# Altium PCB head(mehdi).PcbDoc
Units mil, origin at the board's own origin, x right, y up, seen from the top; angles counter-clockwise.
Board outline 2211.03 x 2288.03 mil, 2 copper layers (Top Layer, Bottom Layer); 78 components, 45 nets, 253 pads, 85 vias.
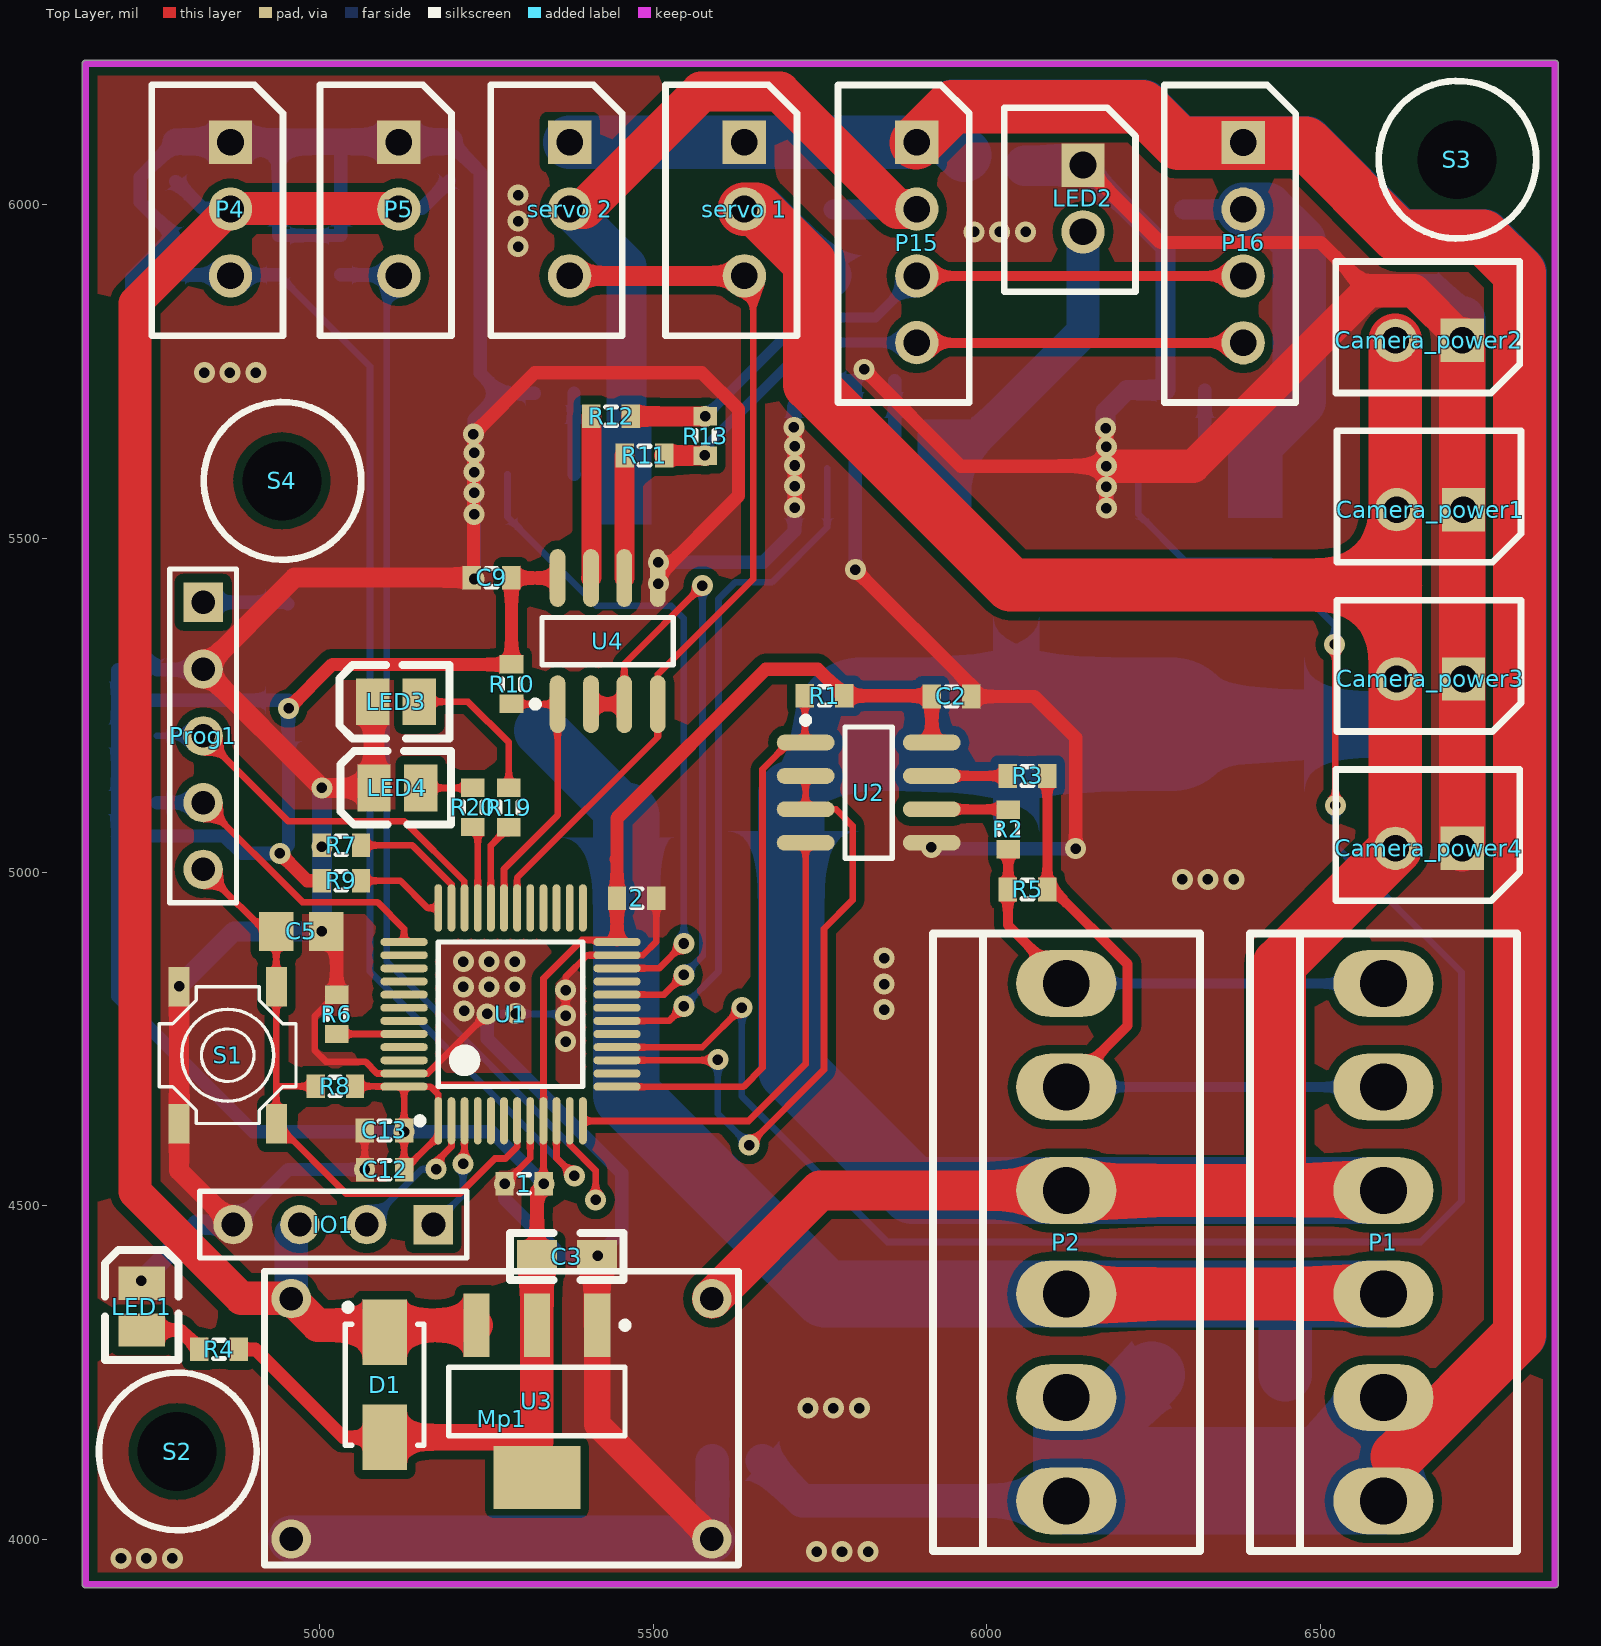
[diagram p0: Top Layer view]
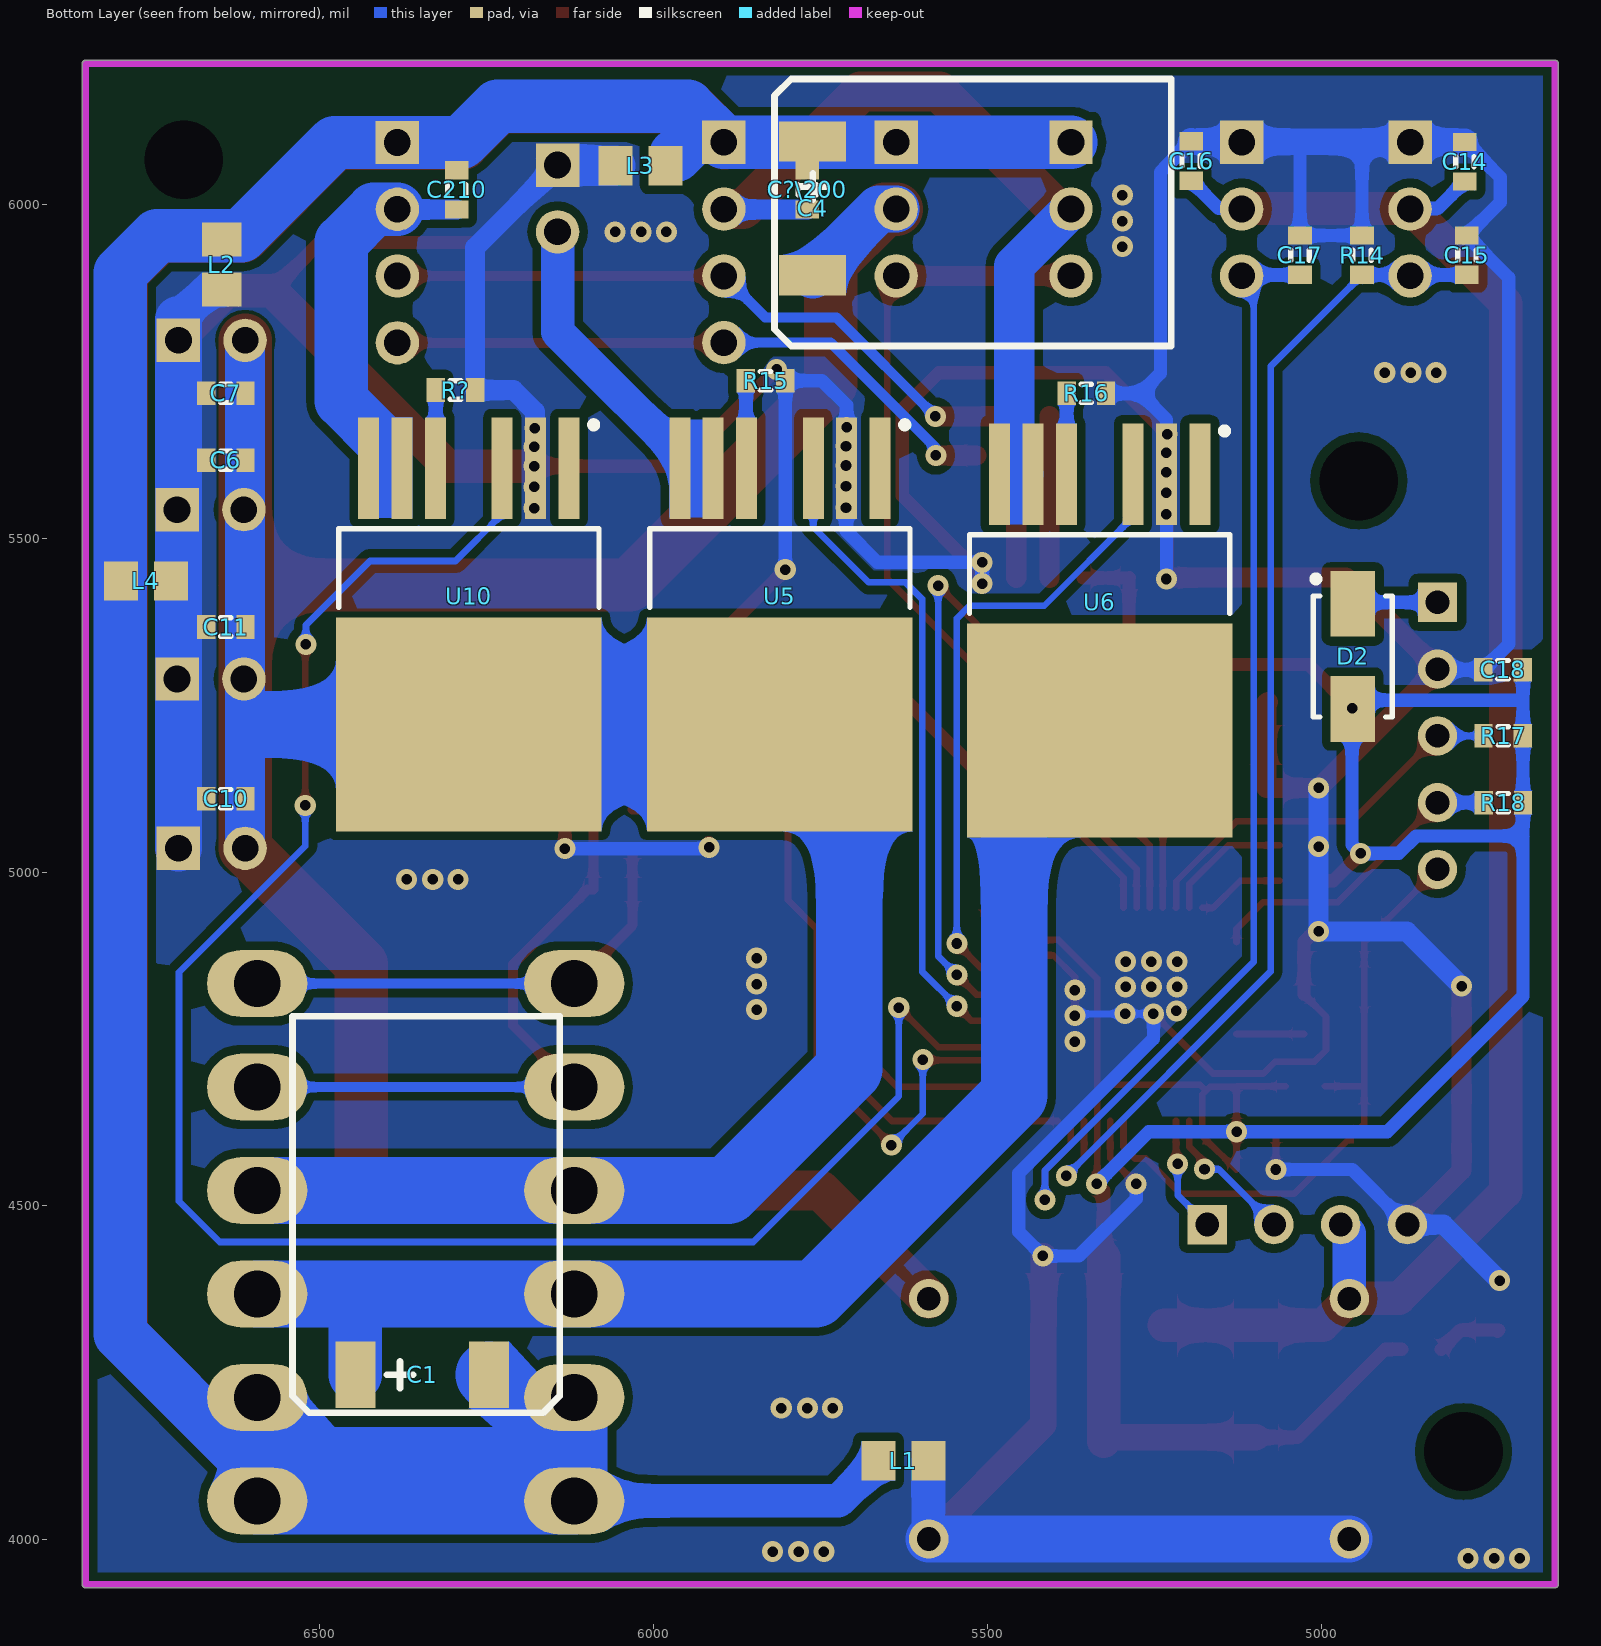
[diagram p1: Bottom Layer view, seen from below]

## Layer stack, top to bottom
Top Solder: solder mask 0.4, Solder Resist, Dk 3.5
Top Layer: signal copper 1.4
Dielectric 1: dielectric 12.6, FR-4, Dk 4.8
Bottom Layer: signal copper 1.4
Bottom Solder: solder mask 0.4, Solder Resist, Dk 3.5

## Board outline
4644.98,3933 ccw(c4650,3933) 4650,3927.99 6851,3927.99 ccw(c6851,3933) 6856.02,3933 6856.02,6211 ccw(c6851,6211) 6851,6216.02 4650,6216.02 ccw(c4650,6211) 4644.98,6211

## Design rules (kind name [scope] priority, off if disabled: settings)
AssemblyTestPointUsage [All] p1 off:
AssemblyTestpoint [All] p1 off: testpointundercomponent=TRUE minsize=40 maxsize=100 preferedsize=60 minholesize=0 maxholesize=40 preferedholesize=32 testpointgrid=1 usegrid=TRUE gridtolerance=0.01 allowsidetop=TRUE allowsidebottom=TRUE
Clearance Clearance_1 [All vs InPolygon] p1: gap=13 ignorepadtopadclearanceinfootprint=FALSE except(0: Arc-Hole Track-Hole SMDPad-Hole THPad-Hole Via-Hole Fill-Hole Poly-Hole Region-Hole Text-Hole)
Clearance [All] p2: gap=7 ignorepadtopadclearanceinfootprint=FALSE except(0: Arc-Hole Track-Hole SMDPad-Hole THPad-Hole Via-Hole Fill-Hole Poly-Hole Region-Hole Text-Hole)
ComponentClearance [All] p1 off: gap=10 collisioncheckmode=3 verticalgap=10 showdistances=FALSE
FabricationTestPointUsage [All] p1 off: valid=0 allowmultiple=FALSE
FabricationTestpoint [All] p1 off: side=3 testpointundercomponent=TRUE minsize=40 maxsize=100 preferedsize=60 minholesize=0 maxholesize=40 preferedholesize=32 testpointgrid=1 allowsidetop=TRUE allowsidebottom=TRUE usegrid=TRUE gridtolerance=0.01
Height [All] p1 off: minheight=0 maxheight=1000 prefheight=500
HoleSize [All] p1 off: absolutevalues=TRUE maxlimit=100 minlimit=1 maxpercent=80.000 minpercent=20.000
HoleToHoleClearance [All] p1 off: gap=10 allowstackedmicrovias=TRUE
LayerPairs [All] p1 off: enforce=TRUE
MinimumSolderMaskSliver [All] p1 off: minsoldermaskwidth=10
NetAntennae [All] p1 off: netantennaetolerance=0
PasteMaskExpansion [All] p1 off: expansion=0
PlaneConnect [All] p1: planeconnectstyle=Direct reliefexpansion=20 reliefentries=4 reliefconductorwidth=10 reliefairgap=10
PolygonConnect [All] p1: connectstyle=Direct reliefconductorwidth=10 reliefentries=4 polygonreliefangle="90 Angle" airgapwidth=10
RoutingVias [All] p1: holewidth=15.75 width=31.5 viastyle="Through Hole" minholewidth=11.81 minwidth=23.62 maxholewidth=28 maxwidth=50
SilkToSilkClearance [All] p1 off: silktosilkclearance=10
SilkToSolderMaskClearance [IsPad] p1 off: minsilkscreentomaskgap=10 clearancetoexposedcopper=TRUE
SolderMaskExpansion [All] p1 off: expansion=4
Width [All] p1: maxlimit=300 minlimit=10 preferedwidth=10
15 further rules are at their usual default settings.

## Components (designator, comment, footprint, x,y, rotation, side; value= is the part's Value field where it differs from the comment)
1 "" j1-0603 5307,4533 r0 top value=100nF
2 "" j1-0603 5475.47,4961 r180 top value=100nF
C1 "Cap Pol1" "CAP 470uf sleep smd" 6344,4438 r180 bottom value=470uf
C2 "Cap" j1-0603 5947,5263 r180 top value=100nF
C3 "Cap_El" 0805 5371,4424 r0 top value=10uF
C4 "Cap Pol1" "CAP 470uf sleep smd" 5571,5991 r270 bottom value="470uF 16V"
C5 "10uF" 2012[0805] 4973,4911 r0 top value=100nF
C6 "100nF" J1-0603 6641,5617 r180 bottom
C7 "100nF" J1-0603 6641,5717 r180 bottom
C9 "Cap" j1-0603 5258,5441 r0 top value=100nF
C10 "100nF" J1-0603 6641,5110 r180 bottom
C11 "100nF" J1-0603 6641,5367 r180 bottom
C12 "" j1-0603 5098,4554 r0 top value=100nF
C13 "" j1-0603 5097.53,4613 r0 top value=100nF
C14 "100nF" J1-0603 4785,6064 r270 bottom
C15 "" j1-0603 4782,5924 r90 bottom value=100n
C16 "100nF" J1-0603 5195,6065 r270 bottom
C17 "" j1-0603 5032,5924 r90 bottom value=100n
C18 "" j1-0603 4728,5303 r180 bottom value=100nF
C210 "100nF" J1-0603 6295,6022 r270 bottom
C?\200 "100nF" J1-0603 5770,6022 r270 bottom
Camera_power1 "Header 2" "jp circular 2" 6714,5542.81 r180 top
Camera_power2 "Header 2" "jp circular 2" 6712,5796.41 r180 top
Camera_power3 "Header 2" "jp circular 2" 6714,5289.22 r180 top
Camera_power4 "Header 2" "jp circular 2" 6712,5035.63 r180 top
D1 "1N4007" US1M 5098,4232 r90 top
D2 "1N4007" US1M 4953,5323 r90 bottom
IO1 "" HDR1X4 5171,4472 r180 top
L1 "" 2012[0805] 5626,4118 r0 bottom value=100uH
L2 "" 2012[0805] 6647,5910 r90 bottom value=100uH
L3 "" 2012[0805] 6020,6058 r180 bottom value=100uH
L4 "" 2012[0805] 6760.6,5436 r0 bottom value=100uH
LED1 "power" 3518 4734,4349 r90 top
LED2 "" "jp circular 2" 6144,6059 r270 top
LED3 "LED3" 3518 5115,5255 r180 top
LED4 "LED2" 3518 5117,5126 r180 top
Mp1 "Mp1584" mp1584-1.8 5628,4401 r180 top
P1 "BUS connector" CON6-TIWAN 6594,4445.5 r270 top
P2 "BUS connector" con6-tiwan 6118.98,4445.5 r270 top
P4 "Gas" "jp circular 3" 4867,6093.14 r270 top
P5 "extra_ADC" "jp circular 3" 5119.26,6093.14 r270 top
P15 "RS485_BUS" "jp circular 4" 5895,6093 r270 top
P16 "RS485_BUS" "jp circular 4" 6384,6092.83 r270 top
Prog1 "Progrommer" HDR1x5 4826,5404 r270 top
R1 "Res1" j1-0603 5757,5264 r180 top value=10K
R2 "Res1" j1-0603 6032,5064 r270 top value=100
R3 "Res1" j1-0603 6061,5144 r0 top value=100
R4 "Res1" j1-0603 4850,4285 r180 top value=220
R5 "Res1" j1-0603 6061,4974 r0 top value=120
R6 "10K" J1-0603 5026,4787 r90 top value=1K
R7 "10K" J1-0603 5033,5040 r180 top value=1K
R8 "" J1-0603 5024,4679 r180 top value=10k
R9 "10K" J1-0603 5033,4987 r0 top value=1K
R10 "Res1" j1-0603 5288,5281.47 r270 top value=10K
R11 "Res1" j1-0603 5487,5624 r0 top value=100
R12 "Res1" j1-0603 5437,5683 r0 top value=100
R13 "Res1" j1-0603 5578,5653 r90 top value=120
R14 "Res" j1-0603 4939,5924 r270 bottom value=10K
R15 "Res1" j1-0603 5832.47,5736 r0 bottom value=1K
R16 "Res1" j1-0603 5352,5717 r0 bottom value=1K
R17 "" J1-0603 4727.53,5204 r180 bottom value=10k
R18 "" J1-0603 4727.47,5104 r180 bottom value=10k
R19 "Res1" j1-0603 5284,5096.53 r90 top value=220
R20 "Res1" j1-0603 5230,5097 r90 top value=220
R? "Res1" j1-0603 6297,5722 r0 bottom value=1K
S1 "SW-PB" sw-pb-4p 4935.67,4828 r270 top
S2 "Screw Hole" "Screw Holw 3-6 mm" 4788,4132 r0 top
S3 "Screw Hole" "Screw Holw 3-6 mm" 6705,6067 r0 top
S4 "Screw Hole" "Screw Holw 3-6 mm" 4945,5586 r0 top
"servo 1" "" "jp circular 3" 5636.77,6093.14 r270 top
"servo 2" "" "jp circular 3" 5375,6093.14 r270 top
U1 "STM32F030C8T6" STM-LQFP48_N 5286.55,4786.9 r90 top
U2 "MAX485CSA" NSO8_N 5823,5119 r0 top
U3 "REG1117-3.3" SOT223 5326,4207 r270 top
U4 "MAX485CSA" NSO8_N 5432,5346 r90 top
U5 "BTS640S2G" TO127P1490X440-8_7N 5811,5370.75 r270 bottom
U6 "BTS640S2G" TO127P1490X440-8_7N 5332,5361.61 r270 bottom
U10 "BTS640S2G" TO127P1490X440-8_7N 6277,5370.75 r270 bottom

## Footprints (in the part's own frame and the unit in brackets; to place one, negate y for a bottom-side part, rotate by r counter-clockwise, add the part's x,y. Pads: shape width x height; smd on the part's side, far side on the other; paste and mask are expansions set on the pad)
0805 [mil]
  rect 60x50 smd: 1(-45,0) 2(45,0)
  silkscreen extent -85,-35 85,35
2012[0805] [mm] "Chip Resistor; Body 2.0 x 1.3 mm (LxW typ)"
  rect 1.3x1.5 smd: 1(-0.95,0) 2(0.95,0)
  body extent -1.22,-0.75 1.28,0.75, height 0.5
3518 [mil]
  rect 50x70 smd: 1(35,0) 2(-35,0)
  silkscreen extent -80,-55 85,55, body extent -63,-31 63,32, height 43
"CAP 470uf sleep smd" [mil]
  rect 60x100 smd: 1(-103,-191) 2(97,-191)
  silkscreen extent -197,-248 203,346
CON6-TIWAN [mil]
  oval 100x150 hole 70: 1(-387.5,0) 2(-232.5,0) 3(-77.5,0) 4(77.5,0) 5(232.5,0) 6(387.5,0)
  silkscreen extent -463,-200 463,200
con6-tiwan [mil]
  oval 100x150 hole 70: 1(-387.5,0) 2(-232.5,0) 3(-77.5,0) 4(77.5,0) 5(232.5,0) 6(387.5,0)
  silkscreen extent -463,-200 463,200
HDR1X4 [mm] "Connector; Header; 4 Position"
  rect 1.5x1.5 hole 0.9: 1(0,0)
  round 1.5 hole 0.9: 2(2.54,0) 3(5.08,0) 4(7.62,0)
  silkscreen extent -1.27,-1.27 8.89,1.27
HDR1x5 [mm] "Connector; Header; 5 Position"
  rect 1.5x1.5 hole 0.9: 1(0,0)
  round 1.5 hole 0.9: 2(2.54,0) 3(5.08,0) 4(7.62,0) 5(10.16,0)
  silkscreen extent -1.27,-1.27 11.43,1.27
j1-0603 [mm] "Chip Resistor, Body 1.6x0.8mm, IPC High Density"
  rect 0.7x0.9 smd: 1(-0.75,0) 2(0.75,0)
  silkscreen extent -0.2,-0.35 0.2,0.35, body extent -0.85,-0.48 0.85,0.48, height 0.9
J1-0603 [mm] "Chip Resistor, Body 1.6x0.8mm, IPC High Density"
  rect 0.7x0.9 smd: 1(-0.75,0) 2(0.75,0)
  silkscreen extent -0.2,-0.35 0.2,0.35, body extent -0.85,-0.48 0.85,0.48, height 0.9
"jp circular 2" [mil]
  rect 65x65 hole 40: 1(0,0)
  round 65 hole 40: 2(100,0)
  silkscreen extent -86,-118 190,79, body extent -96,-118 196,75, height 216
"jp circular 3" [mil]
  rect 65x65 hole 40: 1(0,0)
  round 65 hole 40: 2(100,0) 3(200,0)
  silkscreen extent -86,-118 290,79, body extent -92,-118 298,75, height 216
"jp circular 4" [mil]
  rect 65x65 hole 40: 1(0,0)
  round 65 hole 40: 2(100,0) 3(200,0) 4(300,0)
  silkscreen extent -86,-118 390,79, body extent -92,-118 396,74, height 216
mp1584-1.8 [mm]
  round 1.5 hole 0.9: 1(1.016,10.16) 2(1.016,1.016) 3(17.016,10.16) 4(17.016,1.016)
  silkscreen extent 0,-0.03 18.03,11.15
NSO8_N [mm] "SOIC, 8-Leads, Body 4.9x3.9mm, Pitch 1.27mm, IPC Medium Density"
  oval 2.2x0.6 smd: 1(-2.4,1.905) 2(-2.4,0.635) 3(-2.4,-0.635) 4(-2.4,-1.905) 5(2.4,-1.905) 6(2.4,-0.635) 7(2.4,0.635) 8(2.4,1.905)
  silkscreen extent -2.52,-2.5 0.9,2.88, body extent -2,-2.5 2,2.5, height 1.75
"Screw Holw 3-6 mm" [mil]
  round 0 hole 118.11: 0(-1,0)
  silkscreen extent -118,-118 118,118
SOT223 [mm] "SOT223, 4-Leads, Body 6.7x7.3mm (max), Pitch 2.30mm, IPC Medium Density"
  rect 2.4x1 smd: 1(-2.9,2.3) 2(-2.9,0) 3(-2.9,-2.3)
  rect 2.4x3.3 smd: 4(2.9,0)
  silkscreen extent -3.02,-3.35 1.3,3.48, body extent -1.85,-3.35 1.85,3.35, height 1.8
STM-LQFP48_N [mm] "QFP, 48-Leads, Body 7x7mm, Pitch 0.5mm, IPC Medium Density"
  oval 1.8x0.3 smd: 1(-4.05,2.75) 2(-4.05,2.25) 3(-4.05,1.75) 4(-4.05,1.25) 5(-4.05,0.75) 6(-4.05,0.25) 7(-4.05,-0.25) 8(-4.05,-0.75) 9(-4.05,-1.25) 10(-4.05,-1.75) 11(-4.05,-2.25) 12(-4.05,-2.75) 25(4.05,-2.75) 26(4.05,-2.25) 27(4.05,-1.75) 28(4.05,-1.25) 29(4.05,-0.75) 30(4.05,-0.25) 31(4.05,0.25) 32(4.05,0.75) 33(4.05,1.25) 34(4.05,1.75) 35(4.05,2.25) 36(4.05,2.75)
  oval 0.3x1.8 smd: 13(-2.75,-4.05) 14(-2.25,-4.05) 15(-1.75,-4.05) 16(-1.25,-4.05) 17(-0.75,-4.05) 18(-0.25,-4.05) 19(0.25,-4.05) 20(0.75,-4.05) 21(1.25,-4.05) 22(1.75,-4.05) 23(2.25,-4.05) 24(2.75,-4.05) 37(2.75,4.05) 38(2.25,4.05) 39(1.75,4.05) 40(1.25,4.05) 41(0.75,4.05) 42(0.25,4.05) 43(-0.25,4.05) 44(-0.75,4.05) 45(-1.25,4.05) 46(-1.75,4.05) 47(-2.25,4.05) 48(-2.75,4.05)
  silkscreen extent -4.17,-2.75 2.75,3.57, body extent -3.5,-3.5 3.5,3.5, height 1.6
sw-pb-4p [mm]
  rect 1.5x0.8 smd: 1(0,0) 1(5.2,0) 2(0,-3.7) 2(5.2,-3.7)
  silkscreen extent 0,-4.45 5.2,0.75, body extent 0,-4.45 5.22,0.75, height 2.2
TO127P1490X440-8_7N [mm] "TO,1.27mm pitch;7 pin,14.90mm L X 9.20mm W X 4.40mm H body"
  rect 3.85x0.8 smd paste+0 mask+0: 1(-5.95,3.81) 2(-5.95,2.54) 3(-5.95,1.27) 5(-5.95,-1.27) 6(-5.95,-2.54) 7(-5.95,-3.81)
  rect 8.15x10.1 smd paste+0 mask+0: 8(3.8,0)
  silkscreen extent -7.72,-4.95 -0.65,4.95, body extent -7.47,-5 7.48,5, height 4.51
US1M [mm] "Molded Diode, 2-Leads, Body 4.3x2.6mm, IPC Medium Density"
  rect 2.5x1.7 smd: 1(-2,0) 2(2,0)
  silkscreen extent -2.3,-1.5 3.07,1.52, body extent -2.3,-1.46 2.3,1.46, height 2.3

## Part data
1 2 C12 C13 C18: library part Cap, "Capacitor", Manufacturer="Generic Components", Class=Passive, Published=08/06/2000, Publisher="Altium Hobart Technology Centre", SubClass=Capacitor
C1 C4: "Polarized Capacitor (Radial)", LatestRevisionDate=17-Jul-2002, LatestRevisionNote="Re-released for DXP Platform.", PackageReference=RB7.6-15, Published=8-Jun-2000, Publisher="Altium Limited"
C2 C3 C9: "Capacitor", Publisher="Altium Limited"
  C2 C9: LatestRevisionDate=17-Jul-2002, LatestRevisionNote="Re-released for DXP Platform.", PackageReference=RAD-0.3, Published=8-Jun-2000
  C3: PackageReference=CAPR5-4X5, Published=23-Sep-2002
C5 C6 C7 C10 C11 C14 C16 C210 C?\200: library part Cap, "Capacitor", LatestRevisionDate=17-Jul-2002, LatestRevisionNote="Re-released for DXP Platform.", PackageReference=RAD-0.3, Published=8-Jun-2000, Publisher="Altium Limited"
C15 C17: library part "Cap Pol1", "Polarized Capacitor (Radial)", Manufacturer="Generic Components", Class=Passive, Published=08/06/2000, Publisher="Altium Hobart Technology Centre", SubClass=Capacitor
Camera_power1 Camera_power2 Camera_power3 Camera_power4: "Header, 2-Pin", Publisher="Altium Limited", Revision="17-Jul-2002: Re-released for DXP Platform."
D1 D2: library part Diode, "1 Amp General Purpose Rectifier", Package Information="Latest Revision: Aug-1999", Package Reference=DO-41, Code - JEDEC=DO-204-AL, Datasheet="Latest Revision: 1998", Published=8-Jun-2000, Publisher="Altium Limited", Revision 1="11-Jul-2000: SIM Model Added.", Revision 2="17-Jul-2002: Re-released for DXP Platform."
IO1 P15 P16: library part "Header 4", "Header, 4-Pin", LatestRevisionDate=17-Jul-2002, LatestRevisionNote="Re-released for DXP Platform.", Publisher="Altium Limited"
L1 L2 L3 L4: library part Inductor, "Inductor", Manufacturer="Generic Components", Class=Passive, Published=08/06/2000, Publisher="Altium Hobart Technology Centre", SubClass=Inductor
LED1 LED4: library part LED3, "Typical BLUE SiC LED", PackageDocument=16-Apr-2002, DatasheetDocument=16-Apr-2002, LatestRevisionDate=17-Dec-2003, LatestRevisionNote="PCB Footprint replaced.", PackageReference=3.5X2.8X1.9, Published=8-Jun-2000, Publisher="Altium Limited"
LED2: library part "Header 2", "Header, 2-Pin", LatestRevisionDate=17-Jul-2002, LatestRevisionNote="Re-released for DXP Platform.", Publisher="Altium Limited"
LED3: "Typical BLUE SiC LED", PackageDocument=16-Apr-2002, DatasheetDocument=16-Apr-2002, LatestRevisionDate=17-Dec-2003, LatestRevisionNote="PCB Footprint replaced.", PackageReference=3.5X2.8X1.9, Published=8-Jun-2000, Publisher="Altium Limited"
P1 P2: library part "Header 6", "Header, 6-Pin", LatestRevisionDate=17-Jul-2002, LatestRevisionNote="Re-released for DXP Platform.", Publisher="Altium Limited"
P4 P5 "servo 1" "servo 2": library part "Header 3", "Header, 3-Pin", LatestRevisionDate=17-Jul-2002, LatestRevisionNote="Re-released for DXP Platform.", Publisher="Altium Limited"
Prog1: library part "Header 5", "Header, 5-Pin", LatestRevisionDate=17-Jul-2002, LatestRevisionNote="Re-released for DXP Platform.", Publisher="Altium Limited"
R1 R2 R3 R4 R5 R10 R11 R12 R13 R15 R16 R19 R20 R?: "Resistor", LatestRevisionDate=17-Jul-2002, LatestRevisionNote="Re-released for DXP Platform.", PackageReference=AXIAL-0.3, Published=8-Jun-2000, Publisher="Altium Limited"
R6 R7 R9: library part Res1, "Resistor", LatestRevisionDate=17-Jul-2002, LatestRevisionNote="Re-released for DXP Platform.", PackageReference=AXIAL-0.3, Published=8-Jun-2000, Publisher="Altium Limited"
R8 R17 R18: library part Res, "Semiconductor Resistor", LatestRevisionDate=17-Jul-2002, LatestRevisionNote="Re-released for DXP Platform.", PackageReference=AXIAL-0.5, Published=8-Jun-2000, Publisher="Altium Limited"
R14: "Semiconductor Resistor", LatestRevisionDate=17-Jul-2002, LatestRevisionNote="Re-released for DXP Platform.", PackageReference=AXIAL-0.5, Published=8-Jun-2000, Publisher="Altium Limited"
S1: "Switch", LatestRevisionDate=17-Jul-2002, LatestRevisionNote="Re-released for DXP Platform.", PackageReference=SPST-2, Published=24-Mar-1999, Publisher="Altium Limited"
U1: "ARM Cortex-M0 32-bit MCU, 64 KB Flash, 8 KB Internal RAM, 39 I/Os, 48-pin LQFP, -40 to 85 degC, Tray", I/Os (High Current)=39, Operating Frequency(F) (Processor speed) (MHz)=48, Supplier Part Number 1=497-14043-ND, Supply Voltage(Vcc) min (V)=2.4, ComponentLink1Description="Manufacturer URL", ComponentLink1URL=http://www.st.com/web/en/home.html, ComponentLink2Description=Datasheet, ComponentLink2URL=http://www.st.com/st-web-ui/static/active/en/resource/technical/document/datasheet/DM00088500.pdf, ComponentLink3Description="Package Specification", ComponentLink3URL=http://www.st.com/st-web-ui/static/active/en/resource/technical/document/datasheet/DM00058181.pdf, Core="ARM Cortex-M0", DatasheetVersion="Rev. 1", FLASH Size (Prog) (kB)=64, Internal RAM Size (kB)=8, Mounting Technology="Surface Mount", PackageDescription="48-Pin Low Profile Quad Flat Package, 7 x 7 mm Body, 0.5 mm Pitch", PackageReference=LQFP48, PackageVersion="Rev. 6, 06/2013", Packing=Tray, PartNumber=STM32F030C8T6, Supplier 1=Digi-Key, Supplier 2=Newark, Supplier 3=Mouser, Supplier Part Number 2=06X3647, Supplier Part Number 3=511-STM32F030C8T6
U2 U4: "Low-Power, Slew-Rate-Limited RS-485/RS-422 Transceiver", Code_IPC=SOIC127P600-8, Code_JEDEC=MS-012-AA, ComponentLink1Description="Manufacturer Link", ComponentLink1URL=http://www.maxim-ic.com/, ComponentLink2Description=Datasheet, ComponentLink2URL=http://pdfserv.maxim-ic.com/en/ds/MAX1487-MAX491.pdf, DatasheetVersion=Feb-1996, LatestRevisionDate=13-Apr-2006, LatestRevisionNote="IPC-7351 Footprint Added.", PackageDescription="8-Pin Small Outline Integrated Circuit 1.27 mm Pitch", PackageReference=NSO8, Published=16-Jan-2001, Publisher="Altium Limited"
U3: "800mA and 1A Low Dropout Positive Regulator 2.85V, 3.3V, 5V, and Adjustable", ComponentLink1Description="Manufacturer Link", ComponentLink1URL=http://www.ti.com/, ComponentLink2Description=Datasheet, ComponentLink2URL=http://www-s.ti.com/sc/ds/REG1117.pdf, DatasheetVersion=Sep-1997, LatestRevisionDate=17-Jul-2002, LatestRevisionNote="Re-released for DXP Platform.", PackageDescription="SOT-223/SC-73; 4 Leads; Body 6.7 x 7.3 mm, inc. leads (LxW max)", PackageReference=ZZ311, PackageVersion=revC, Published=8-Jun-2000, Publisher="Altium Limited"
U5 U6 U10: "Smart Sense High-Side Power Switch, VBB 43V, R(ON) 30mOhm", Manufacturer="Infineon Technologies", ManufacturerPartNumber=BTS640S2G, PackageReference=PG-TO263-7-2

## Via types
v1: diameter 31.5, hole 15.75, Top Layer to Bottom Layer, tented both sides, 78 vias
v2: diameter 31.5, hole 15.75, Top Layer to Bottom Layer, 7 vias

## Nets (pads, with @x,y where several pads share a name; then routed paths per layer and width w, separated by ;. In a path a pad name is that pad's centre, name@x,y a point inside that pad or via, vN(x,y) a via of type N, cw(c..) or ccw(c..) an arc to the next point about the centre after c; other vN are vias at no path point)
1wire: "servo 1.3" "servo 2.3" U1.30 U4.4 | length 1399.9
  Top Layer w10: U1.30 5296.39,4991.39 5507,5202 U4.4 5507,5296 5650,5439 5650,5893.14 ; 5636.77,5890.14 5636.77,5891
  Top Layer w30: 5375,5893.14 5633.77,5893.14 ; 5636.77,5890.14 5633.77,5893.14 ; 5650,5893.14 5636.77,5893.14 5633.77,5893.14
  Bottom Layer w10: 5618,5874.37 5636.77,5893.14
+3.3: 1.2 2.2 C2.2 C3.1 C9.2 C12.2 C13.2 C18.2 D1.1 D2.1 R1.1 R4.1 R8.1 R9.1 R10.1 R17.2 R18.2 U1.1 U1.9 U1.24 U1.48 U2.8 U3.2 U3.4 U4.8 | length 5375.1
  Top Layer w10: R8.1 5126.73,4679 U1.48 ; v1(5336.53,4533) 5335.76,4533.76 U1.9 5335.76,4682 ; U1.24@5445.94,4898.44 5393.44,4898.44 5335.76,4840.76 5335.76,4682 ; U1.48 5166.37,4678.63 5172.5,4672.5 ; U1.48 U1.48 C13.2 5127.06,4554.47 C12.2 5178.28,4604.76 U1.1 5178.28,4666.72 5172.5,4672.5 ; 5172.5,4672.5 5181.31,4681.31 5335.08,4681.31 5335.76,4682
  Top Layer w20: R4.1 4904,4285 5035.74,4153.26 D1.1 ; v1(4941,5028) 4982,4987 R9.1 ; v1(4954,5245.26) 5019.74,5311 R10.1 C9.2@5288,5440.53 ; C9.2 C9.2@5288,5440.53 ; C3.1 5326,4522.47 v1(5336.53,4533) ; U4.8 5288.04,5440.49 C9.2@5288,5440.53 ; 5444.94,5019 5445.94,5018 ; U1.24@5446,4898.39 5446,4898.44 5445.94,4898.5 2.2 5445.94,5018 ; C2.2 5916.47,5264 R1.1 5746.53,5304 5669,5304 5445.94,5080.94 5445.94,5018 ; U2.8 C2.2
  Top Layer w40: D1.1 5319.74,4153.26 5326,4147
  Top Layer w50: 5326,4147 U3.2 C3.1
  Bottom Layer w20: C18.2 4697.94,5302.47 4697.94,5259 ; D2.1@4953,5213.47 D2.1 v1(4954,5245.26) 4954,5041 v1(4941,5028) 4884,5028 4858,5054 4697.94,5054 ; D2.1@4954,5257.47 4699.47,5257.47 4697.94,5259 ; v1(5336.53,4533) 5258.53,4611 v1(5127,4611) 4901,4611 4697.94,4814.06 4697.94,5054 ; 4697.94,5054 R18.2 4697.94,5259
+5: C14.2 C16.2 D1.2 IO1.3 Mp1.4 P4.2 P5.2 U3.3 | length 2686.3
  Top Layer w50: P5.2@5119.26,5994 4866,5994 4724,5852 4724,4521 4883.28,4361.72 4957.36,4361.72 Mp1.4 4997.91,4321.17 U3.3
  Bottom Layer w20: C14.2 4825.47,5994 P4.2@4866,5994 ; P5.2@5119.26,5994 5153.53,5994 C16.2
  Bottom Layer w50: Mp1.4 4958.08,4459.08 IO1.3
+12: "servo 1.2" C4.2 C6.2 C7.2 C10.2 C11.2 Camera_power1.2 Camera_power2.2 Camera_power3.2 Camera_power4.2 Mp1.2 P1.3 P2.3 U5.8 U10.8 | length 6992.8
  Top Layer w60: Mp1.2 5750,4523 P2.3
  Top Layer w80: 5636.77,5993.14 5653.86,5993.14 5735,5912 5735,5731 6036,5430 6612,5430 ; P2.3 P1.3 ; 6438,4566 6438,4861.63 Camera_power4.2 6612,5430 ; Camera_power2.2 6612,5430
  Bottom Layer w60: Camera_power4.2 6612,5542.81 Camera_power2.2
  Bottom Layer w70: 5636.77,5993.14 5662.86,5993.14 C4.2
  Bottom Layer w80: U5.8@5707,5117.14 U5.8 U5.8@5864.08,5274.22 ; P2.3 P2.3@6143,4523
  Bottom Layer w100: U5.8@5707,5117.14 5707,4705 5889,4523 P2.3 ; P2.3@6143,4523 P1.3 ; U10.8 6590,5221.14
  Bottom Layer w200: U5.8 U10.8
+12_Switch: C210.2 P16.2 U10.6 U10.7 | length 519.1
  Bottom Layer w30: C210.2 6383.64,5992.47 P16.2
  Bottom Layer w80: P16.2 6419.17,5992.83 6468,5944 6468,5706 6406,5644
+16: C1.1 P1.4 P2.4 U6.8 | length 2453.3
  Top Layer w80: P2.4 P1.4
  Bottom Layer w80: U6.8 U6.8@5460,5084 ; 6445,4368 6447,4366 C1.1
  Bottom Layer w100: U6.8@5460,5084 5460,4666 5758,4368 P2.4 6445,4368 P1.4
+16_Switch: "servo 2.2" C?\200.2 P15.2 U6.6 U6.7 | length 1244.1
  Top Layer w60: 5375,5993.14 5396.14,5993.14 5572,6169 5690,6169 5866,5993 P15.2
  Bottom Layer w30: C?\200.2 5894.47,5992.47 P15.2
  Bottom Layer w60: 5375,5993.14 5460,5908.14 5460,5609.86 5446,5595.86 5460.86,5595.86
Bus_EN_max: U1.15 U2.2 U2.3 | length 970.9
  Top Layer w10: U1.15 5596,4718 v1(5597,4719) ; v1@5644,4592 5756,4704 5756,4915 5799,4958 5799,5069 5774,5094 U2.3 U2.2
  Bottom Layer w10: v1(5597,4719) 5597,4638 v1(5644,4591)
Bus_RXUSART: R1.2 U1.13 U2.1 | length 829.2
  Top Layer w10: U1.13@5445.24,4678.28 5635.28,4678.28 5664,4707 5664,5154 5704,5194 U2.1 5727.47,5195.04 R1.2
Bus_TXUSART: U1.12 U2.4 | length 700.6
  Top Layer w10: U1.12@5394.78,4627.1 5643.1,4627.1 5728.51,4712.51 U2.4
D+: P1.1 P2.1 R2.2 R5.1 | length 713
  Top Layer w15: R2.2 6032,4974.53 R5.1 6031.47,4920.5 P2.1
  Bottom Layer w15: P2.1 P1.1
D-: P1.2 P2.2 R3.2 R5.2 | length 1034
  Top Layer w15: R3.2 R5.2 6099,4974 6211,4862 6211,4770.02 P2.2
  Bottom Layer w15: P2.2 P1.2
Dyna_D+: P15.4 P16.4 R11.2 R13.1 | length 945
  Top Layer w15: P15.4 5895.17,5792.83 P16.4
  Top Layer w30: R11.2 v2(5577.47,5624) R13.1
  Bottom Layer w15: v2(5577.47,5624) 5577.47,5635.47 5735,5793 P15.4
Dyna_D-: P15.3 P16.3 R12.2 R13.2 | length 1004.3
  Top Layer w15: P15.3 6383.83,5893 P16.3
  Top Layer w30: R12.2@5467,5682.53 v2(5578,5682.53)
  Bottom Layer w15: v2(5578,5682.53) 5726.47,5831 5833,5831 P15.3
EN_max: U1.20 U4.2 U4.3 | length 982.8
  Top Layer w10: U1.20 5516.43,4816.43 v1(5546,4846) ; U4.3 5457,5312 v1(5574,5429)
  Top Layer w20: U4.2 U4.3
  Bottom Layer w10: v1(5546,4846) 5574,4874 v1(5574,5429)
ex_ADC: C17.1 P5.3 U1.11 | length 1744.2
  Top Layer w10: U1.11 5375.13,4591.87 5414,4553 v1(5414,4509)
  Bottom Layer w10: P5.3@5118.78,5894.47 5119.26,5894 5101,5875.74 5101,4866 5414,4553 v1(5414,4509)
  Bottom Layer w20: C17.1 P5.3@5118.78,5894.47
EXT_LED_EN: U1.18 U5.3 | length 1036.4
  Top Layer w10: U1.18 5524.06,4777.06 v1(5546,4799)
  Bottom Layer w10: v1(5546,4799) 5598,4851 5598,5409 5623,5434 5678,5434 5761,5517 U5.3
gas_sensor: C15.1 P4.3 R14.2 U1.10 | length 1783.4
  Top Layer w10: U1.10 5355.45,4571.55 v1(5382,4545)
  Bottom Layer w10: R14.2 5076,5757.47 5076,4851 v1(5382,4545)
  Bottom Layer w20: C15.1 R14.2
GND: 1.1 2.1 C2.1 C3.2 C5.2 C6.1 C7.1 C9.1 C10.1 C11.1 C12.1 C13.1 C14.1 C15.2 C16.1 C17.2 C18.1 Camera_power1.1 Camera_power2.1 Camera_power3.1 Camera_power4.1 IO1.4 L1.1 L2.1 L3.1 L4.1 LED1.1 LED2.1 LED3.1 LED4.1 Mp1.1 Mp1.3 P4.1 P5.1 Prog1.2 R6.2 R7.2 R14.1 R15.1 R16.1 R?.1 S1.2 U1.8 U1.23 U1.47 U2.5 U3.1 U4.5 U5.2 U6.2 U10.2 | length 14645
  Top Layer w10: R6.2 4993,4783.53 4993,4733 5010,4716 5069,4716 5086.69,4698.31 U1.47 5162.31,4698.31 v1(5251.5,4787.5) ; C13.1 v1(5068,4554.47) C12.1 ; v1(5277.47,4533) 5316.08,4571.61 U1.8 ; v1(5369,4785) v1(5369,4823) 5369,4843 5401.48,4875.48 U1.23 5484.48,4875.48 5505,4896 2.1
  Top Layer w20: C5.2 5026,4895.4 R6.2 ; C9.1 5231,5443.53 5231,5599 v1(5231,5656) 5323,5748 5573,5748 5628,5693 5628,5563.49 5506,5441.49 U4.5 ; v1(5711,5666) 5712,5665 v1(5712,5638) v1(5712,5609) v1(5712,5578) v1(5712,5546) ; v2(5803,5453) 5976.53,5279.47 C2.1 6071,5263 6133,5201 v1(6133,5035) ; v2(5816,5753) 5961,5608 v1(6179,5608) ; v1(5917,5037) 5917,5043.22 5917.49,5043.71 U2.5 ; LED2.1 6260,5943 6500,5943 6572,5871 ; v1(6178,5665) 6179,5664 v1(6179,5637) v1(6179,5608) ; v1(6179,5545) v1(6179,5577) v1(6179,5608) ; 6637.41,5871 Camera_power2.1
  Top Layer w30: S1.2@4790,4828 4790,4623.28 4790,4553 IO1.4 ; LED3.1 5082,5253 LED4.1 v1(5004,5126) Prog1.2 4963,5441 C9.1
  Top Layer w40: C3.2 5416,4321.72 U3.1 5416.55,4172.45 Mp1.1
  Top Layer w50: v1(6179,5608) 6309,5608 6572,5871 6637.41,5871 6639.23,5871 6712,5798.23 Camera_power2.1
  Top Layer w70: Camera_power4.1 Camera_power2.1
  Bottom Layer w10: v1(5251.5,4787.5) 5366.5,4787.5 v1(5369,4785)
  Bottom Layer w20: Prog1.2 4825,5303 C18.1 4719,5341.53 4719,5890.53 C15.2 4732,6003.53 4732,6040.53 C14.1 4865.53,6093.53 P4.1@4866,6094 ; IO1.4 4953.47,4554.47 v1(5068,4554.47) ; 4939,6095 4939,6094 R14.1 C17.2 5032,6092 ; C16.1 5241,6048.53 5241,5747 5271,5717 ; v1(5232,5439) U6.2 5232,5678 5271,5717 ; v1(5251.5,4787.5) 5251.5,4750.5 5453,4549 5453,4461 v1(5417,4425) 5363,4425 5277.47,4510.53 v1(5277.47,4533) ; R16.1 5271,5717 ; v1(5508,5432) v1(5508,5464) 5665,5464 5712,5511 v1(5712,5546) v1(5712,5578) ; U5.2 5711,5638 v1(5711,5666) 5711,5699 5748,5736 R15.1 ; v2(5803,5453) 5802.94,5453.06 R15.1 ; v2(5816,5753) 5816,5749.06 R15.1 ; v1(5917,5037) 5917,5040 5922,5035 v1(6133,5035) ; U10.2@6178,5604 6178,5608 v1(6178,5665) ; v1(6179,5545) v1(6179,5577) ; Camera_power4.1@6712,5026 Camera_power4.1
  Bottom Layer w30: v1(4733,4388) 4817,4472 IO1.4 ; v1(4790,4829) 4872,4911 v1(5004,4911) v1(5004,5038) v1(5004,5126) ; L1.1@5588,4117.4 L1.1 ; LED2.1 6267.47,5935.53 R?.1 6210,5722 6178,5690 v1(6178,5665)
  Bottom Layer w40: C14.1 4785.47,6094 4866,6094 4939,6094 C16.1@5187,6094 ; C16.1@5195,6094 C16.1
  Bottom Layer w50: Mp1.1 5588.6,4001.6 L1.1 ; L2.1@6646,5871 6669,5871 Camera_power2.1@6712,5828
  Bottom Layer w60: L3.1 6143,6058 LED2.1
  Bottom Layer w70: Mp1.3 Mp1.1 ; Camera_power4.1 6712,5436 Camera_power2.1 Camera_power2.1@6712,5828
  other v1: 4703,3972 4741,3972 4780,3972 5745,3982 5783,3982 5822,3982 5732,4197 5770,4197 5809,4197 5369,4746 5294,4788 5217,4792 5846,4794 5216,4828 5254.5,4828 5293,4828 5846,4832 5216,4866 5254.5,4866 5293,4866 5846,4871 6293,4989 6331,4989 6370,4989 5232,5536 5232,5568 5232,5599 5232,5628 4828,5748 4866,5748 4905,5748 5298,5937 5981,5959 6019,5959 6058,5959 5298,5975 5298,6014
IO1: IO1.1 U1.3 | length 179.5
  Top Layer w10: v1(5215.31,4563) 5217.65,4560.65 U1.3
  Bottom Layer w10: IO1.1 5215.31,4516.31 v1(5215.31,4563)
IO2: IO1.2 U1.2 | length 220.3
  Top Layer w10: v1(5175,4555) 5175,4566 5197.97,4588.97 U1.2
  Bottom Layer w10: IO1.2 5154,4555 v1(5175,4555)
LED_blue: R19.1 U1.32 | length 131.8
  Top Layer w10: U1.32 5257.02,5040.02 R19.1
LED_red: R20.1 U1.33 | length 124.2
  Top Layer w10: R20.1 5237.34,5060.13 U1.33
NetD2_2: D2.2 Prog1.1 | length 127.9
  Bottom Layer w20: Prog1.1 4950.74,5404 D2.2
NetLED1_1: LED1.2 R4.2 | length 101.3
  Top Layer w20: LED1.2@4736,4312 LED1.2 4791.47,4314 R4.2
NetLED2_2: LED2.2 U5.6 U5.7 | length 445.6
  Bottom Layer w50: 5935,5600 6144,5809 LED2.2
NetLED3_1: LED3.2 R19.2 | length 227.2
  Top Layer w10: LED3.2 5223,5255 5284,5194 R19.2
NetLED4_1: LED4.2 R20.2 | length 78.2
  Top Layer w10: LED4.2 5229.47,5126 R20.2
NetR2_1: R2.1 U2.6 | length 114.7
  Top Layer w15: U2.6 6031.53,5094 R2.1
NetR3_1: R3.1 U2.7 | length 114
  Top Layer w15: U2.7 R3.1
NetR6_1: R6.1 U1.44 | length 101.1
  Top Layer w10: R6.1 5127,4757.47 U1.44
NetR7_1: R7.1 U1.35 | length 194.8
  Top Layer w10: R7.1 5139.48,5040 5197.97,4981.51 U1.35
NetR9_2: R9.2 U1.36 | length 132.6
  Top Layer w10: R9.2 5121.47,4987 5162.13,4946.35 U1.36
NetR11_1: R11.1 U4.6 | length 183.7
  Top Layer w30: U4.6 5457,5623.53 R11.1
NetR12_1: R12.1 U4.7 | length 242.7
  Top Layer w30: U4.7 5407.47,5440.96 R12.1
NetR15_2: R15.2 U5.5 | length 131.4
  Bottom Layer w20: U5.5 5862,5606 R15.2
NetR16_2: R16.2 U6.5 | length 121.3
  Bottom Layer w20: R16.2 5381.53,5596.33 U6.5
NetR?_2: R?.2 U10.5 | length 117.2
  Bottom Layer w20: R?.2 6326.53,5605.47 U10.5
PGND: "servo 1.1" "servo 2.1" C1.2 C4.1 C210.1 C?\200.1 L1.2 L2.2 L3.2 L4.2 P1.5 P1.6 P2.5 P2.6 P15.1 P16.1 | length 8317.7
  Top Layer w80: P15.1@5893.86,6092.14 5947.86,6146.14 6232.86,6146.14 6287.03,6091.97 6477.03,6091.97 6616.86,5952.14 6742.86,5952.14 6797.86,5897.14 6797.86,4307.14 6614.86,4124.14
  Bottom Layer w50: L1.2 5723.4,4058 P2.6
  Bottom Layer w80: 5375,6093.14 5636.77,6093.14 5894.86,6093.14 P15.1 5949,6147 ; L3.2@5966.8,6073.8 5949,6091.6 5949,6147 ; 6616,4125 6799,4308 6799,5898 6744,5953 6618,5953 6478.17,6092.83 P16.1 6288.17,6092.83 6234,6147 5949,6147
  Bottom Layer w100: P2.5 6118.98,4118.98 ; C1.2 6118.98,4118.98 ; 6118.98,4118.98 6499.98,4118.98 P1.5 P1.6 P2.6 6118.98,4118.98
RST: C5.1 Prog1.5 R8.2 S1.1 U1.7 | length 958.1
  Top Layer w10: Prog1.5 4935.67,4894.33 4935.67,4828 4935.67,4680 ; R8.2 4936.67,4679 4935.67,4680 ; U1.7 5296.39,4588.39 5279,4571 5263,4571 5210,4518 5040.67,4518 4935.67,4623 4935.67,4623.28 4935.67,4680
RXUSART: R10.2 U1.31 U4.1 | length 407.6
  Top Layer w10: U1.31 5276.71,5004.71 5357,5085 U4.1 5288.43,5251.51 R10.2
Servo_12_EN: U1.16 U10.3 | length 2911.6
  Top Layer w10: U1.16 5573.69,4737.69 v2(5633,4797) ; v2(6521,5341) 6522,5340 v2(6522,5100)
  Bottom Layer w10: v2(5633,4797) 5633,4664 5851,4446 6650,4446 6711,4507 6711,4850 6522,5039 v2(6522,5100) ; U10.3 6227,5536 6297,5466 6425,5466 6521,5370 v2(6521,5341)
Servo_16_EN: U1.22 U6.3 | length 993.2
  Top Layer w10: U1.22 5508.8,4855.8 v1(5546,4893)
  Bottom Layer w10: U6.3 5282,5532 5415,5399 5527,5399 5546,5380 v1(5546,4893)
SWCLK: Prog1.4 R18.1 U1.37 | length 468.3
  Top Layer w10: Prog1.4 4826,5103.76 4974.76,4955 5087,4955 5127.1,4914.9 U1.37
  Bottom Layer w20: R18.1 Prog1.4
SWDIO: Prog1.3 R17.1 U1.34 | length 590.5
  Top Layer w10: Prog1.3 4954,5076 5127.52,5076 5217.25,4986.27 5217.25,4946.75 U1.34
  Bottom Layer w10: R17.1 Prog1.3
pads on no net: S2.0 S3.0 S4.0 U1.4 U1.5 U1.6 U1.14 U1.17 U1.19 U1.21 U1.25 U1.26 U1.27 U1.28 U1.29 U1.38 U1.39 U1.40 U1.41 U1.42 U1.43 U1.45 U1.46 U5.1 U6.1 U10.1

## Polygon pours and split planes (outlines as drawn)
GND on Top Layer "Bottom Layer-No Net" (solid, remove dead copper, pour order 12): 6851,3933 4650,3933 4650,6211 6851,6211
GND on Bottom Layer "Bottom Layer-No Net" (solid, remove dead copper, pour order 8): 4650,3933 4650,6211 6851,6211 6851,3933

## Keep-outs
Keep-Out Layer:
  lines w10: 4650,3933 4650,6211 6851,6211 6851,3933 4650,3933

## Other copper
Bottom Layer:
  rectangle net +12_Switch: 6361,5530 6443,5682
  rectangle net +16_Switch: 5417,5521 5498,5671
  rectangle net NetLED2_2: 5896,5531 5977,5678